# Altium PCB ESP-Grow_OLED_Rev_A.1.PcbDoc
Units mil, origin at the board's own origin, x right, y up, seen from the top; angles counter-clockwise.
Board outline 1000 x 1300 mil, 2 copper layers (Top Layer, Bottom Layer); 7 components, 5 nets, 32 pads, 74 vias.
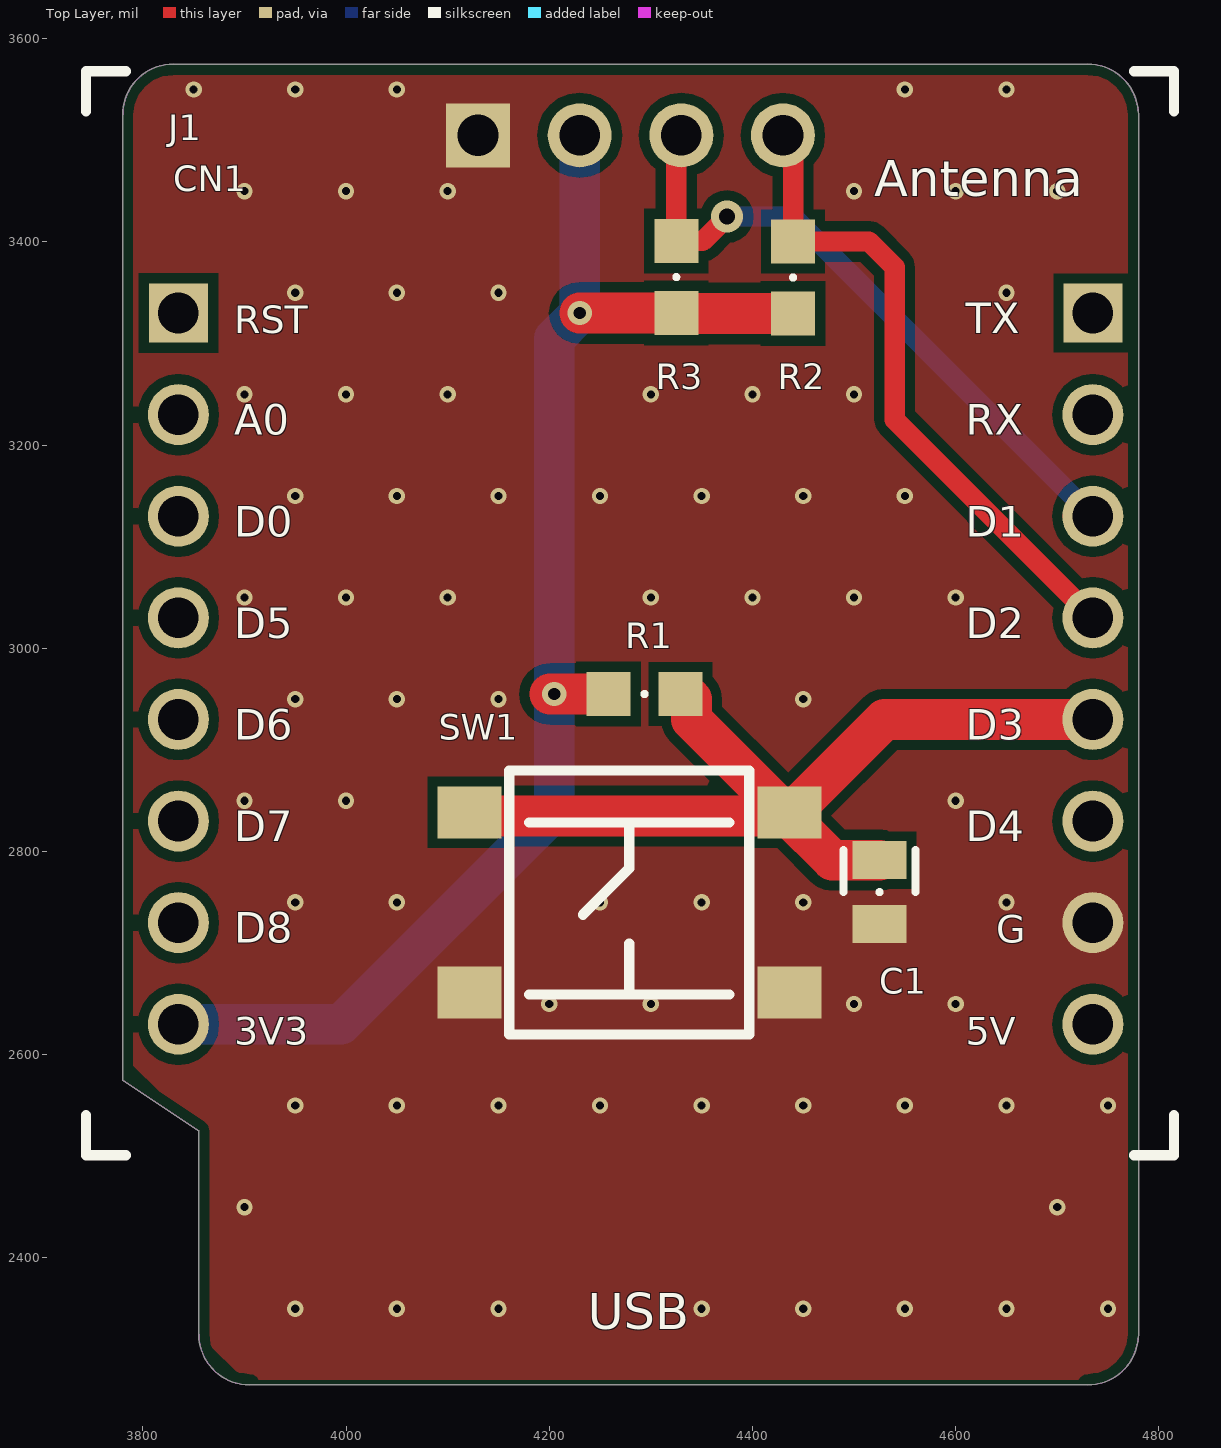
[diagram p0: Top Layer view]
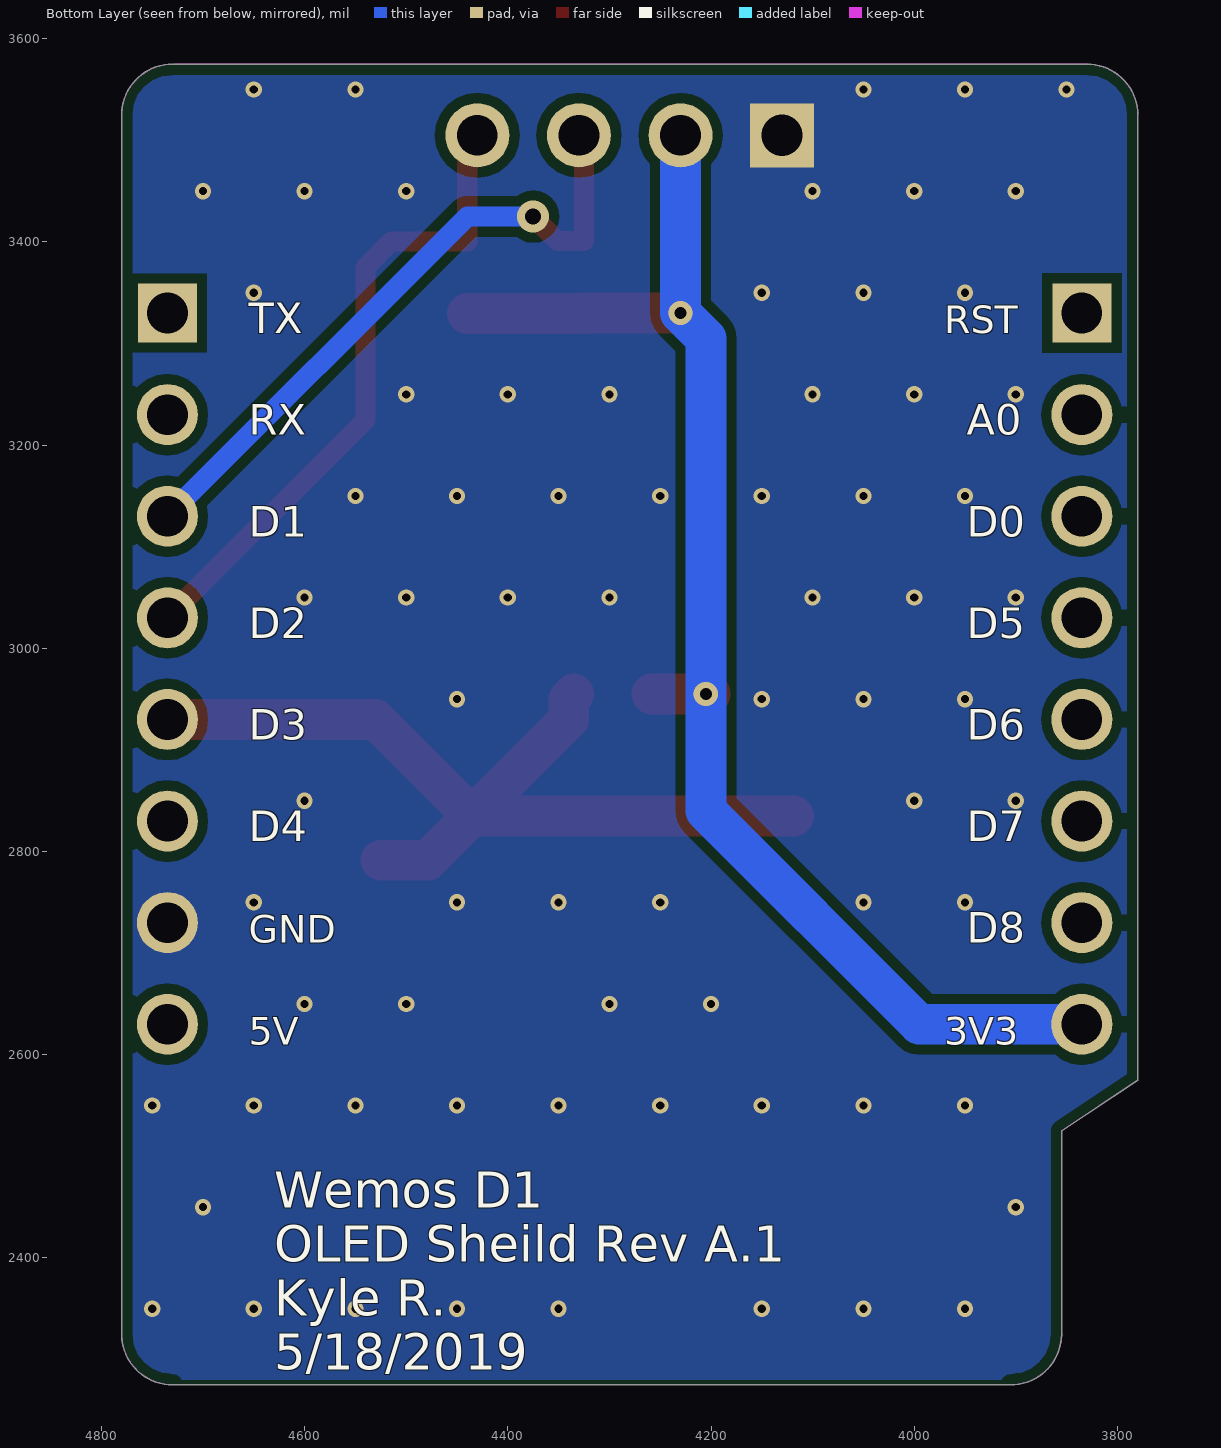
[diagram p1: Bottom Layer view, seen from below]
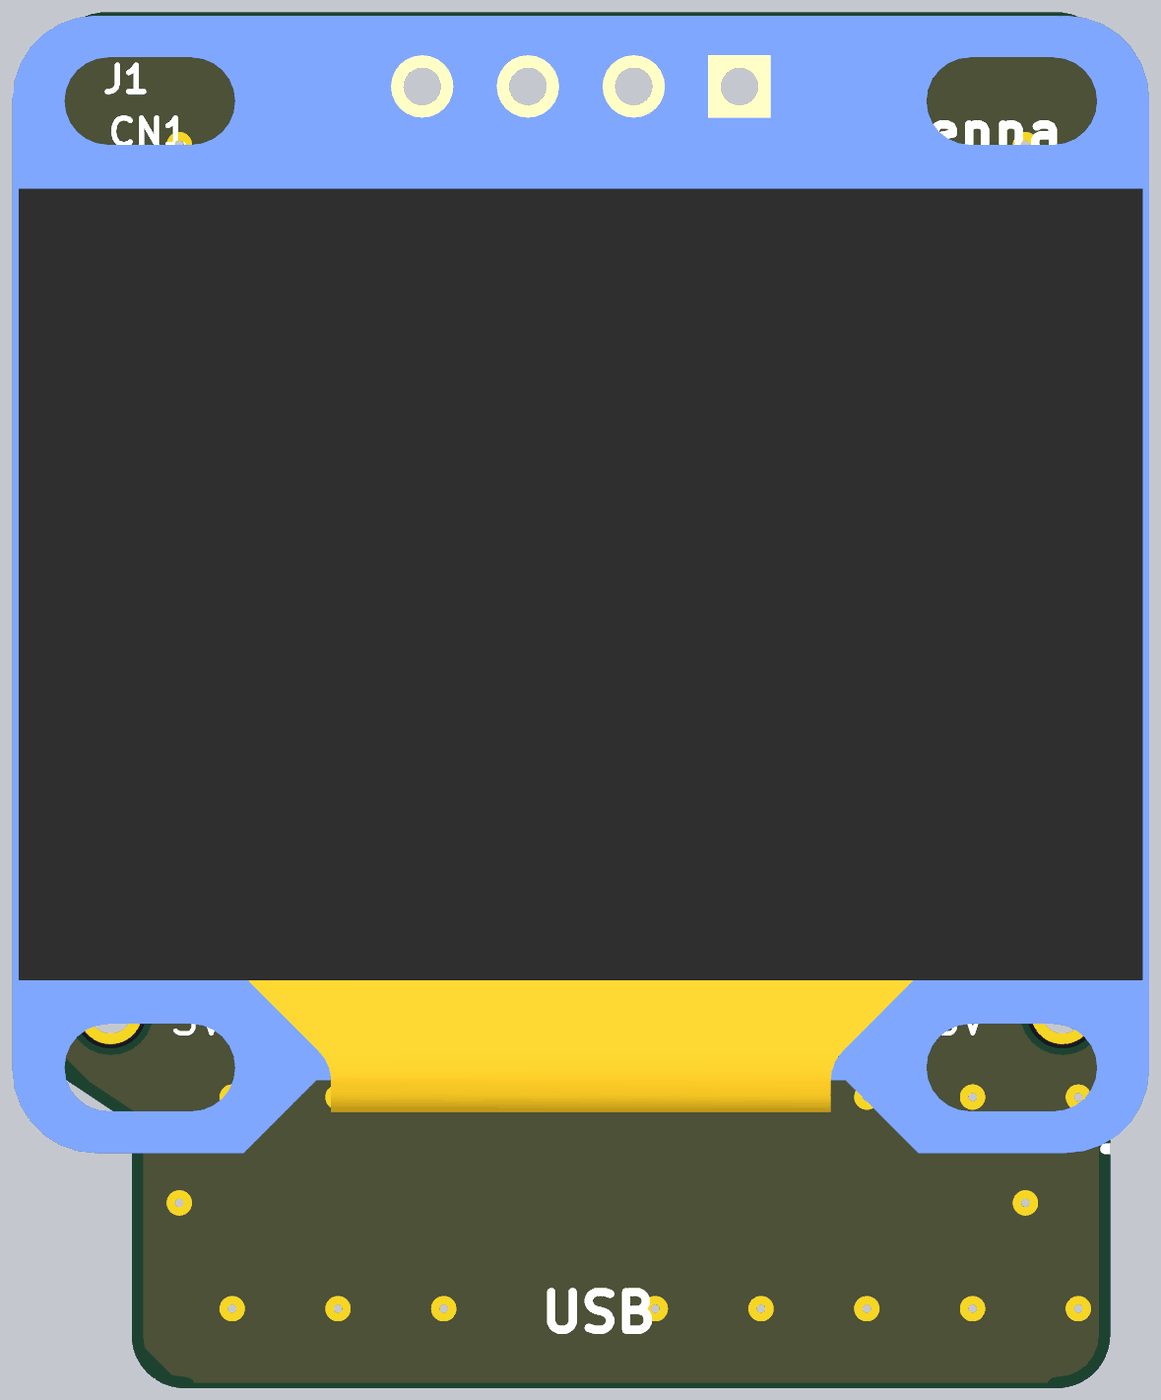
[diagram p2: 3D render of the assembled board from above, using the file's embedded part models]

## Layer stack, top to bottom
Top Solder: solder mask 0.4, Solder Resist, Dk 3.5
Top Layer: signal copper 1.4
Dielectric 1: dielectric 12.6, FR-4, Dk 4.8
Bottom Layer: signal copper 1.4
Bottom Solder: solder mask 0.4, Solder Resist, Dk 3.5

## Board outline
3780,2575 3855,2525 3855,2325 ccw(c3905,2325) 3905,2275 4730,2275 ccw(c4730,2325) 4780,2325 4780,3525 ccw(c4730,3525) 4730,3575 3830,3575 ccw(c3830,3525) 3780,3525

## Design rules (kind name [scope] priority, off if disabled: settings)
BoardOutlineClearance [All] p1 off: gap=10 ignorepadtopadclearanceinfootprint=FALSE except(0: Arc-SplitContinuation Track-SplitContinuation SMDPad-SplitContinuation THPad-SplitContinuation Via-SplitContinuation Fill-SplitContinuation Region-SplitContinuation Text-SplitContinuation; 25: Poly-OutlineEdge Poly-CavityEdge Poly-CutoutEdge Poly-SplitBarrior Poly-SplitContinuation)
Clearance [All] p1: gap=10 ignorepadtopadclearanceinfootprint=FALSE except(0: Arc-Hole Track-Hole SMDPad-Hole THPad-Hole Via-Hole Fill-Hole Poly-Hole Region-Hole Text-Hole)
MinimumSolderMaskSliver [All] p1: minsoldermaskwidth=2
PlaneConnect [All] p1: planeconnectstyle=Direct reliefexpansion=20 reliefentries=4 reliefconductorwidth=10 reliefairgap=10
PolygonConnect [All] p1: connectstyle=Direct reliefconductorwidth=10 reliefentries=4 polygonreliefangle="90 Angle" airgapwidth=10
RoutingVias [All] p1: holewidth=24 width=12 viastyle="Through Hole" minholewidth=10 minwidth=6 maxholewidth=28 maxwidth=50
SilkToSolderMaskClearance [IsPad] p1: minsilkscreentomaskgap=2 clearancetoexposedcopper=TRUE
SolderMaskExpansion [All] p1: expansion=4
Width [All] p1: maxlimit=100 minlimit=6 preferedwidth=10 minimp=50.000000 maximp=50.000000 favimp=50.000000
27 further rules are at their usual default settings.

## Components (designator, comment, footprint, x,y, rotation, side; value= is the part's Value field where it differs from the comment)
C1 "0.1uF" CAPC0805(2012)_L 4525,2760 r270 top
CN1 "J/Wemo_ESP_Shield" Wemos_d1_no3d 3781.38,2282.6 r0 top
J1 "OLED 0.96\"" OLED_0.96_I2C 4130,3505 r0 top locked
R1 "10K" RESC0603(1608)_M 4293.75,2955 r0 top
R2 "10K" RESC0603(1608)_M 4440,3365 r90 top
R3 "10K" RESC0603(1608)_M 4325,3365.43 r90 top
SW1 "PTS645SM43SMTR92 LFS" "SW TACT Red 6mm x 6mm" 4278.74,2750 r0 top

## Footprints (in the part's own frame and the unit in brackets; to place one, negate y for a bottom-side part, rotate by r counter-clockwise, add the part's x,y. Pads: shape width x height; smd on the part's side, far side on the other; paste and mask are expansions set on the pad)
CAPC0805(2012)_L [mm] "Chip Capacitor, Body 2.0x1.2mm, Height 1.55mm, IPC High Density"
  rect 0.95x1.35 smd: 1(-0.8,0) 2(0.8,0)
  silkscreen extent -1.05,-0.9 0.05,0.9, body extent -1.1,-0.72 1.1,0.72, height 1.55
OLED_0.96_I2C [mm]
  rect 1.6x1.6 hole 1.03: 1(0,0)
  round 1.6 hole 1.02: 2(2.54,0) 3(5.08,0) 4(7.62,0)
  silkscreen extent -9.8,-25.5 17.4,1.6, body extent -9.85,-25.6 17.45,1.7, height 9
RESC0603(1608)_M [mm] "Chip Resistor, Body 1.6x0.8mm, IPC Low Density"
  rect 1.1x1.1 smd: 1(-0.9,0) 2(0.9,0)
  silkscreen extent -0.05,-0.05 0.05,0.05, body extent -0.8,-0.43 0.8,0.43, height 0.51
"SW TACT Red 6mm x 6mm" [mm] "Switch, tactile, red button, SMD 6 mm x 6 mm"
  rect 1.6x1.3 smd: 1(-4,2.25) 2(4,2.25) 3(-4,-2.25) 4(4,-2.25)
  silkscreen extent -3,-3.3 3,3.3, body extent -4.5,-3.1 4.5,3.1, height 4.3
Wemos_d1_no3d [mil] "Wemos D1 footprint"
  rect 58.09x58.09 / inner rect 60x60 / far side rect 58.09x58.09 hole 40: 1(53.62,1047.4) 16(953.62,1047.4)
  round 60 hole 40: 2(53.62,947.4) 3(53.62,847.4) 4(53.62,747.4) 5(53.62,647.4) 6(53.62,547.4) 7(53.62,447.4) 8(53.62,347.4) 9(953.62,347.4) 10(953.62,447.4) 11(953.62,547.4) 12(953.62,647.4) 13(953.62,747.4) 14(953.62,847.4) 15(953.62,947.4)

## Part data
C1: library part CMP-007-0047-08, "CAP CER 0.1UF 50V 10% X7R 0805", Capacitance=100nF, Dielectric Material=Ceramic, Package (Imperial)=0805, Package (Metric)=2012, Temperature (Max)=150°C, Temperature (Min)=-55°C, Temperature Coefficient=X8R, Tolerance=10%, Voltage (Rated)=50V, Height=1.4mm, Length=2mm, Mounting Type=SMD, Width=1.25mm
CN1: "Wemo Mini Shield for ESP-12", Name="Wemo Mini Shield"
J1: library part OLED_0.96_I2C, "SSD1306 I2C OLED 0.96\""
R1 R2 R3: library part CMP-007-0359-12, "RES 10K OHM 1/10W 1% 0603 SMD", Package (Imperial)=0603, Package (Metric)=1608, Power=100mW, Resistance=10k, Temperature Coefficient=±100ppm/°C, Tolerance=1%, Height=550µm, Termination=SMD/SMT
SW1: "SWITCH TACTILE SPST-NO 0.05A 12V", Contact Rating @ Voltage="0.05A @ 12VDC", Illumination Type, Color=-, Manufacturer=C&K, Operating Force=160gf, Operating Temperature="-20°C ~ 60°C", Actuator Height off PCB, Vertical=4.30mm, Actuator Length, Right Angle=-, Actuator Material="Polyamide (PA66), Nylon 6/6", Actuator Orientation="Top Actuated", Actuator Type=Standard, Circuit=SPST-NO, ComponentLink1Description=http://www.ckswitches.com/media/1471/pts645.pdf, ComponentLink1URL=http://www.ckswitches.com/media/1471/pts645.pdf, Component Name="PTS645SM43SMTR92 LFS", Features="Blue Actuator", Illumination=Non-Illuminated, Illumination Voltage (Nominal)=-, Ingress Protection=-, Manufacturer Part Number="PTS645SM43SMTR92 LFS", Mechanical Life="100,000 Cycles", Mounting Type="Surface Mount", Outline="6.00mm x 6.00mm", Packaging="Cut Tape (CT)", Part Status=Active, Pin Count=4, Pricing 1="1=0.15, 10=0.147, 25=0.1416, 50=0.1366, 100=0.129, 250=0.12144, 500=0.11638 (USD)", RoHS="RoHS Compliant", Stock 1=234699, Switch Function=Off-Mom, Switch Travel=-, Termination Style="Gull Wing"

## Via types
v1: diameter 16, hole 8, Top Layer to Bottom Layer, 71 vias
v2: diameter 24, hole 12, Top Layer to Bottom Layer, 2 vias
v3: diameter 31.5, hole 15.75, Top Layer to Bottom Layer, 1 vias

## Nets (pads, with @x,y where several pads share a name; then routed paths per layer and width w, separated by ;. In a path a pad name is that pad's centre, name@x,y a point inside that pad or via, vN(x,y) a via of type N, cw(c..) or ccw(c..) an arc to the next point about the centre after c; other vN are vias at no path point)
3.3V: CN1.8 J1.2 R1.1 R2.1 R3.1 | length 1400.1
  Top Layer w40: v2@4200.77,2955 v2(4205,2955) 4225,2955 R1.1 ; v2(4230,3330) R3.1 4325.43,3329.57 R2.1
  Bottom Layer w40: CN1.8 3995,2630 4205,2840 v2(4205,2955) 4205,3305 v2(4230,3330) J1.2
BTN_OLED: C1.1 CN1.12 R1.2 SW1.1 SW1.2 | length 925.2
  Top Layer w40: SW1.1@4118.58,2835 SW1.2@4435,2835 ; R1.2@4335,2955 4340,2950 4340,2930 SW1.2@4435,2835 ; C1.1 4478.5,2791.5 SW1.2@4435,2835 ; CN1.12 4530,2930 SW1.2@4435,2835
GND: C1.2 CN1.10 J1.1 SW1.3 SW1.4
  other v1: 3950,2350 4050,2350 4150,2350 4350,2350 4450,2350 4550,2350 4650,2350 4750,2350 3900,2450 4700,2450 3950,2550 4050,2550 4150,2550 4250,2550 4350,2550 4450,2550 4550,2550 4650,2550 4750,2550 4200,2650 4300,2650 4500,2650 4600,2650 3950,2750 4050,2750 4250,2750 4350,2750 4450,2750 4650,2750 3900,2850 4000,2850 4600,2850 3950,2950 4050,2950 4150,2950 4450,2950 3900,3050 4000,3050 4100,3050 4300,3050 4400,3050 4500,3050 4600,3050 3950,3150 4050,3150 4150,3150 4250,3150 4350,3150 4450,3150 4550,3150 3900,3250 4000,3250 4100,3250 4300,3250 4400,3250 4500,3250 3950,3350 4050,3350 4150,3350 4650,3350 3900,3450 4000,3450 4100,3450 4500,3450 4600,3450 4700,3450 3850,3550 3950,3550 4050,3550 4550,3550 4650,3550
OLED_SCL: CN1.14 J1.3 R3.2 | length 673.4
  Top Layer w10: CN1.14@4710,3130 CN1.14
  Top Layer w20: J1.3 4325,3500 R3.2 4350.87,3400.87 v3(4375,3425)
  Bottom Layer w20: v3(4375,3425) 4440,3425 CN1.14
OLED_SDA: CN1.13 J1.4 R2.2 | length 645
  Top Layer w20: J1.4 4440,3495 R2.2 4514.57,3400.43 4540,3375 4540,3225 CN1.13
pads on no net: CN1.1 CN1.2 CN1.3 CN1.4 CN1.5 CN1.6 CN1.7 CN1.9 CN1.11 CN1.15 CN1.16

## Polygon pours and split planes (outlines as drawn)
GND on Bottom Layer "GND_L02_P000" (solid, remove dead copper, pour order 0): 3775,3575 4780,3575 4780,2285 4785,2280 3775,2280
GND on Top Layer "Top Layer-GND" (solid, pour order 2): 3900,2280 3855,2325 3855,2525 3775,2605 3775,3575 4780,3575 4780,2285 4785,2280

## Keep-outs
Keep-Out Layer:
  lines w1: 3828.74,3575 4728.74,3575 ; 3830,3575 ccw(c3830,3525) 3780,3525 3780,2575 3855,2525 3855,2325 ccw(c3905,2325) 3905,2275 ; 4730,2275 ccw(c4730,2325) 4780,2325 4780,3525 ccw(c4730,3525) 4730,3575

## Silkscreen, mask and mechanical layers (free items; w line width, h text height)
Top Overlay:
  text "RST" at 3890,3310 h27.2
  text "TX" at 4610,3310 h29.75
  text "A0" at 3890,3210 h29.75
  text "RX" at 4610,3210 h29.75
  text "D0" at 3890,3110 h29.75
  text "D1" at 4610,3110 h29.75
  text "D5" at 3890,3010 h29.75
  text "D2" at 4610,3010 h29.75
  text "D6" at 3890,2910 h29.75
  text "D3" at 4610,2910 h29.75
  text "D7" at 3890,2810 h29.75
  text "D4" at 4610,2810 h29.75
  text "D8" at 3890,2710 h29.75
  text "G" at 4640,2710 h27.2
  text "3V3" at 3890,2610 h27.2
  text "5V" at 4610,2610 h27.2
Bottom Overlay:
  text "RST" at 3970.67,3310 h27.2
  text "TX" at 4655,3310 h29.75
  text "A0" at 3948.49,3210 h29.75
  text "RX" at 4655,3210 h29.75
  text "D0" at 3948.49,3110 h29.75
  text "D1" at 4655,3110 h29.75
  text "D5" at 3948.49,3010 h29.75
  text "D2" at 4655,3010 h29.75
  text "D6" at 3948.49,2910 h29.75
  text "D3" at 4655,2910 h29.75
  text "D7" at 3948.49,2810 h29.75
  text "D4" at 4655,2810 h29.75
  text "D8" at 3948.49,2710 h29.75
  text "GND" at 4655,2710 h27.2
  text "3V3" at 3970.67,2610 h27.2
  text "5V" at 4655,2610 h27.2
  text "Wemos D1 / OLED Sheild Rev A.1 / Kyle R.  / 5/18/2019" at 4630,2290 h35.43
Mechanical 1:
  lines w1: 3828.74,3575 4728.74,3575 ; 3830,3575 ccw(c3830,3525) 3780,3525 3780,2575 3855,2525 3855,2325 ccw(c3905,2325) 3905,2275 ; 4730,2275 ccw(c4730,2325) 4780,2325 4780,3525 ccw(c4730,3525) 4730,3575

## Text inside footprints (layer, text, board x,y; h text height)
CN1: Top Overlay "Antenna" at 4520,3445 h35.43; Top Overlay "USB" at 4238.07,2329.84 h35.43